# Altium PCB pcb(acdc, standart).PcbDoc
Units mm, origin at the board's own origin, x right, y up, seen from the top; angles counter-clockwise.
Board outline 137.16 x 88.9 mm, 2 copper layers (Top Layer, Bottom Layer); 37 components, 25 nets, 101 pads, 2 vias.
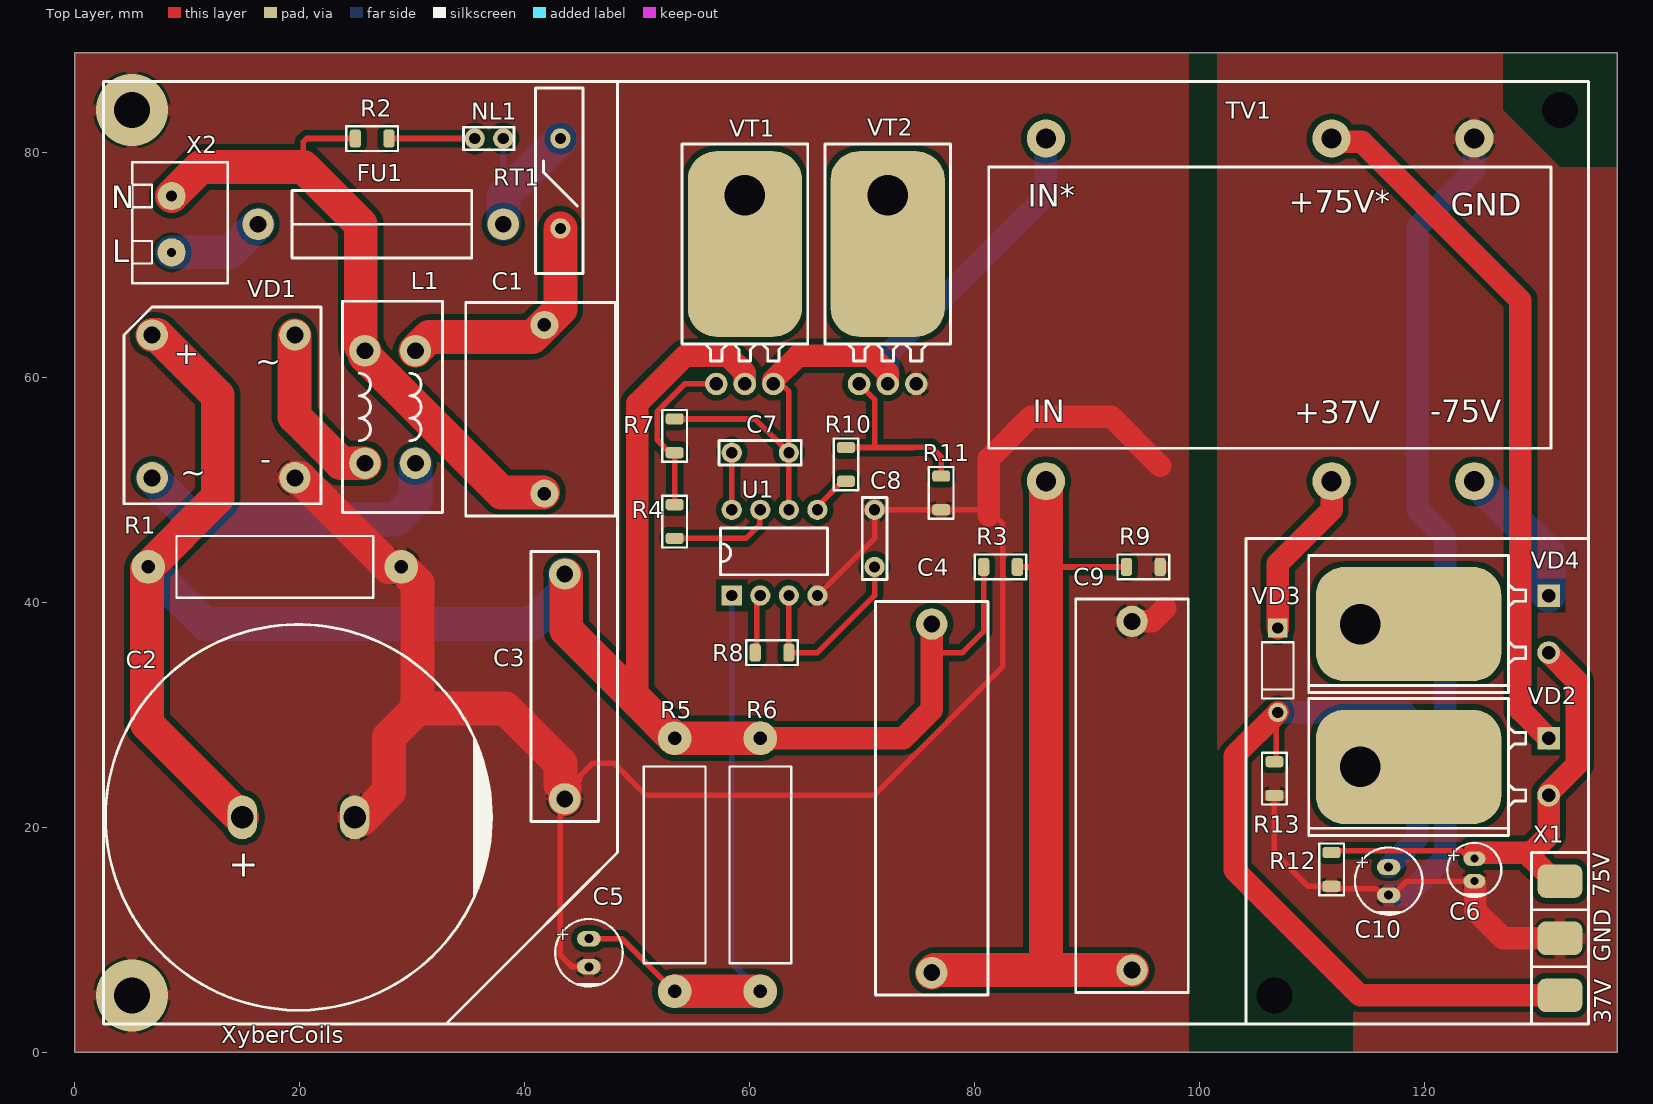
[diagram p0: Top Layer view]
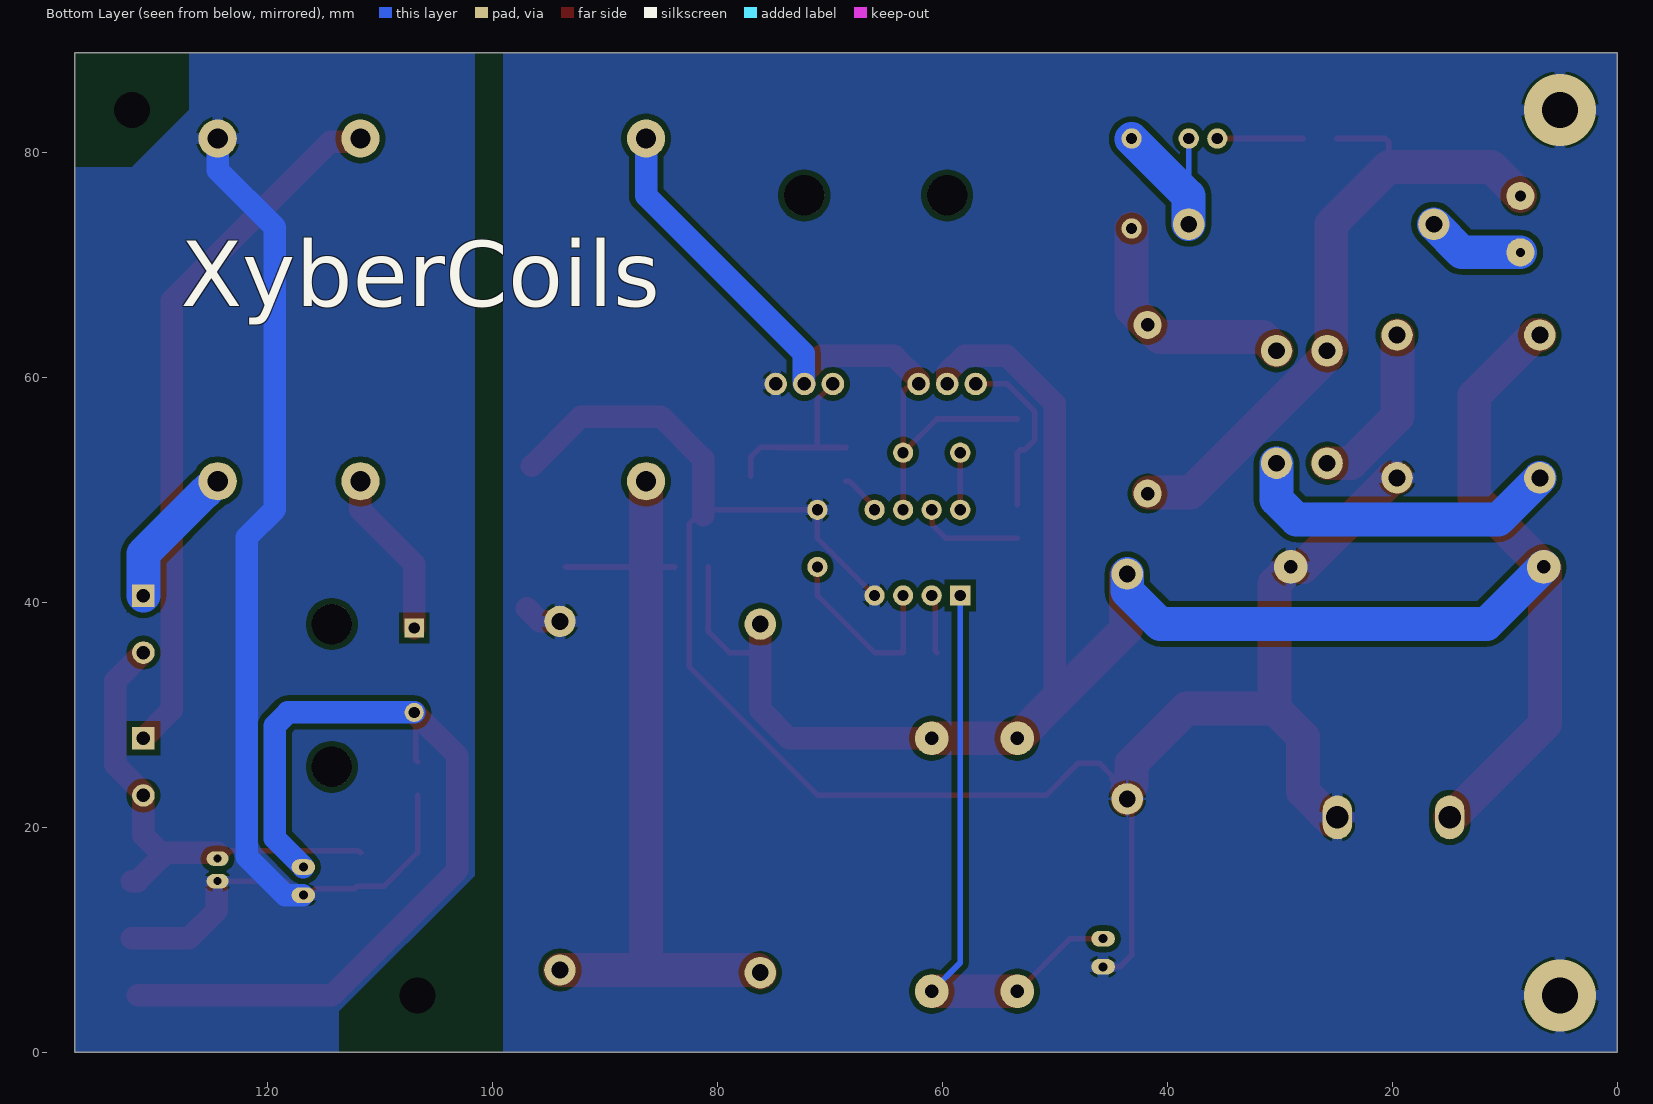
[diagram p1: Bottom Layer view, seen from below]

## Layer stack, top to bottom
Top Solder: solder mask 0.0102, Solder Resist, Dk 3.5
Top Layer: signal copper 0.0356
Dielectric 1: dielectric 0.32, FR-4, Dk 4.8
Bottom Layer: signal copper 0.0356
Bottom Solder: solder mask 0.0102, Solder Resist, Dk 3.5

## Board outline
0,0 0,88.9 137.16,88.9 137.16,0

## Design rules (kind name [scope] priority, off if disabled: settings)
Clearance [All] p1: gap=0.5 ignorepadtopadclearanceinfootprint=FALSE except(0: Arc-Text Track-Text SMDPad-Hole THPad-Hole Via-Hole Fill-Hole Poly-Hole Region-Hole Text-Hole; 0.254: Arc-Via Arc-Hole Track-Via Track-Hole SMDPad-SMDPad SMDPad-THPad SMDPad-Via SMDPad-Text THPad-THPad THPad-Via THPad-Text Via-Via Via-Text Fill-Text Poly-Text Region-Text Text-Text)
Height [All] p1: minheight=0 maxheight=50 prefheight=12.7
HoleSize [All] p1: absolutevalues=TRUE maxlimit=5 minlimit=0.025 maxpercent=80.000 minpercent=20.000
PlaneConnect [All] p1: planeconnectstyle=Relief reliefexpansion=0.508 reliefentries=4 reliefconductorwidth=1 reliefairgap=0.254
PolygonConnect [All] p1: connectstyle=Relief reliefconductorwidth=1 reliefentries=4 polygonreliefangle="90 Angle" airgapwidth=0.254
RoutingVias [All] p1: holewidth=0.6 width=1 viastyle="Through Hole" minholewidth=0.6 minwidth=1 maxholewidth=0.711 maxwidth=1
SolderMaskExpansion [All] p1: expansion=0.102 istentingtop=FALSE
Width [All] p1: maxlimit=3 minlimit=0.5 preferedwidth=2 minimp=50.000000 maximp=50.000000 favimp=50.000000
27 further rules are at their usual default settings.

## Components (designator, comment, footprint, x,y, rotation, side; value= is the part's Value field where it differs from the comment)
C1 "220n" "Конд_эмп P 15ММ" 41.761,49.704 r90 top
C2 "470u" "кондер ELEC D35.00mm S10.00mm H40.00mm" 19.889,20.913 r180 top
C3 "1u" "Конд_плен - P 20мм" 43.57,22.553 r90 top
C4 "4.7u" "конд металопленочный P 31мм" 76.2,38.1 r270 top
C5 "100u" "конд ELEC D6.30mm S2.50mm H11.00mm" 45.72,8.87 r90 top
C6 "47u" "конд ELEC D5.00mm S2.00mm H11.00mm" 124.46,16.24 r90 top
C7 "1u" "конд. кер. мн. слойные" 63.5,53.34 r180 top
C8 "1n" "конд. кер. мн. слойные" 71.12,48.26 r270 top
C9 "4.7u" "конд металопленочный P 31мм" 94.017,7.335 r90 top
C10 "47u" "конд ELEC D6.30mm S2.50mm H11.00mm" 116.84,15.24 r90 top
FU1 "8A" "предохранитель 20х5" 16.3,73.66 r0 top
L1 "FL2D-A2-202" "синфазный дросель FL2D-A2-202" 25.793,62.408 r270 top
NL1 "Lamp (Neon)" "2 PIN" 35.56,81.28 r0 top
R1 "51k 2W" "Res 2w" 17.78,43.18 r180 top
R2 "180k" R1206 24.94,81.28 r0 top
R3 "120k" R1206 80.82,43.18 r0 top
R4 "25" R1206 53.34,45.72 r90 top
R5 "51k 2W" "Res 2w" 53.34,16.69 r90 top
R6 "51k 2W" "Res 2w" 60.96,16.69 r90 top
R7 "10k" R1206 53.34,56.34 r270 top
R8 "36k" R1206 63.5,35.56 r180 top
R9 "120k" R1206 93.52,43.18 r0 top
R10 "25" R1206 68.58,50.8 r90 top
R11 "10k" R1206 77.049,48.26 r90 top
R12 "33k" R1206 111.76,14.78 r90 top
R13 "10k" R1206 106.68,22.86 r90 top
RT1 "JNR15S070L" "NTC 15мм (посадочное8мм)" 43.18,81.28 r270 top
TV1 "4:1:1:2" "Imp trans (2 wind, 2 sold)" 86.36,81.28 r0 top
U1 "IR2153D" "DIP 8" 58.42,40.64 r90 top
VD1 "BR1010" "BR_10(диодный мост)" 6.876,63.806 r0 top
VD2 "BYC10-600PQ" "TO-220-top(2 PIN DIODE)" 131.064,22.86 r270 top
VD3 "HER101" DO-41 106.98,37.741 r270 top
VD4 "BYC10-600PQ" "TO-220-top(2 PIN DIODE)" 131.064,35.56 r270 top
VT1 "FCPF7N60" TO-220-top 57.047,59.457 r180 top
VT2 "FCPF7N60" TO-220-top 69.747,59.457 r180 top
X1 "Soldering" "place 3" 132.08,10.16 r0 top
X2 "Soldering" 5мм 8.606,73.66 r270 top

## Footprints (in the part's own frame and the unit in brackets; to place one, negate y for a bottom-side part, rotate by r counter-clockwise, add the part's x,y. Pads: shape width x height; smd on the part's side, far side on the other; paste and mask are expansions set on the pad)
"2 PIN" [mm]
  round 1.8 hole 1: 1(0,0) 2(2.54,0)
  silkscreen extent -1,-1 3.5,1
5мм [mm]
  round 2.5 hole 0.8: 1(2.5,0)
  round 2.5 hole 1: 2(-2.5,0)
  silkscreen extent -5.5,-3.5 5.25,5, body extent -5.25,-3.3 5,4.5, height 10.7
"BR_10(диодный мост)" [mm]
  round 2.8 hole 1.5: 1(0,-12.7) 2(12.7,0) 3(12.7,-12.7) 4(0,0)
  silkscreen extent -2.5,-15 15,2.5
"DIP 8" [mm]
  rect 1.8x1.8 hole 1: 1(0,0)
  round 1.8 hole 1: 2(0,-2.54) 3(0,-5.08) 4(0,-7.62) 5(7.62,-7.62) 6(7.62,-5.08) 7(7.62,-2.54) 8(7.62,0)
  silkscreen extent 1.85,-8.5 6,1
DO-41 [mm]
  rect 1.7x1.7 hole 1: 1(0,0)
  round 1.7 hole 1: 2(7.5,0)
  silkscreen extent 1.25,-1.4 6.25,1.4, body extent -0.41,-1.2 7.91,1.2, height 2.53
"Imp trans (2 wind, 2 sold)" [mm]
  round 3.4 hole 1.8: 1(0,0) 2(0,-30.48) 3(25.4,0) 4(25.4,-30.48) 5(38.1,0) 6(38.1,-30.48)
  silkscreen extent -5.08,-27.54 44.92,-2.54
"NTC 15мм (посадочное8мм)" [mm]
  round 1.8 hole 1: 1(0,0) 2(8,0)
  silkscreen extent -4.5,-2.2 12,2
"place 3" [mm]
  rrect50% 4x3 smd: 1(0,5.08) 2(0,0) 3(0,-5.08)
  silkscreen extent -2.54,-7.62 2.54,7.62
R1206 [mm]
  rrect50% 1x1.6 smd: 1(0,0) 2(3,0)
  silkscreen extent -0.8,-1.1 3.8,1.1, body extent -0.03,-0.77 2.98,0.78, height 0.55
"Res 2w" [mm]
  round 3 hole 1.2: 1(-11.25,0) 2(11.25,0)
  silkscreen extent -8.75,-2.75 8.75,2.75, body extent -11.65,-2.5 11.65,2.5, height 5.5
TO-220-top [mm]
  rrect50% 10.16x16.51 smd: 0(-2.54,-12.446)
  round 3.556 hole 3.6: 0(-2.54,-16.764)
  round 2 hole 1.2: 1(0,0) 2(-2.54,0) 3(-5.08,0)
  silkscreen extent -8.13,-21.34 3.05,-2.03
"TO-220-top(2 PIN DIODE)" [mm]
  rrect50% 10.16x16.51 smd: 0(-2.54,-12.446)
  round 3.556 hole 3.6: 0(-2.54,-16.764)
  rect 2x2 hole 1.2: 1(-5.08,0)
  round 2 hole 1.2: 2(0,0)
  silkscreen extent -8.64,-21.34 3.56,-2.03
"конд ELEC D5.00mm S2.00mm H11.00mm" [mm] "5mm Diameter 2mm Lead Spacing Aluminum Electrolytic Capacitors Radial, Can"
  oval 1.3x1.95 hole 0.7: 1(1,0) 2(-1,0)
  silkscreen extent -2.4,-2.4 2.4,2.4, body extent -2.51,-2.5 2.5,2.5, height 11
"конд ELEC D6.30mm S2.50mm H11.00mm" [mm] "6.30mm Diameter 11.00mm Lead Spacing Aluminum - Polymer Capacitors Radial, Can"
  oval 1.4x2.1 hole 0.8: 1(1.25,0) 2(-1.25,0)
  silkscreen extent -3,-3 3,3, body extent -3.16,-3.15 3.15,3.15, height 11
"конд металопленочный P 31мм" [mm]
  round 2.8 hole 1.5: 1(0,0) 2(31,0)
  silkscreen extent -2,-5 33,5
"конд. кер. мн. слойные" [mm]
  round 1.8 hole 1: 1(0,0) 2(5.08,0)
  silkscreen extent -1.1,-1.1 6.2,1.1
"Конд_плен - P 20мм" [mm]
  round 2.8 hole 1.5: 1(0,0) 2(20,0)
  silkscreen extent -2,-3 22,3
"Конд_эмп P 15ММ" [mm]
  round 2.5 hole 1.2: 1(0,0) 2(15,0)
  silkscreen extent -2,-6.29 17,7
"кондер ELEC D35.00mm S10.00mm H40.00mm" [mm] "35mm Diameter 10mm Lead Spacing Aluminum Electrolytic Capacitors Radial, Can , Snap-In"
  oval 2.6x3.9 hole 2: 1(5,0) 2(-5,0)
  silkscreen extent -17.18,-17.15 17.15,17.15
"предохранитель 20х5" [mm]
  round 2.8 hole 1.5: 1(0,0) 2(21.8,0)
  silkscreen extent 3,-3 19,3
"синфазный дросель FL2D-A2-202" [mm]
  round 2.8 hole 1.5: 1(0,4.5) 2(0,0) 3(10,0) 4(10,4.5)
  silkscreen extent -4.4,-2 14.4,6.9

## Part data
C1 C3 C7 C8: library part Capacitor
C2: library part "Capacitor (Electrolytic)"
C4 C9: library part Capacitor, "К73-17"
C5: library part "Capacitor (Electrolytic)", "K50-35 25V"
C6: library part "Capacitor (Electrolytic)", "К50-35 100V"
C10: library part "Capacitor (Electrolytic)", "К50-35 50V"
FU1: library part Fuse
L1: library part "Common Choke", "2x2mH, 12A, 2x145mOhm"
R1: library part Resistor, "2W"
R2 R3 R4 R5 R6 R7 R8 R9 R10 R11 R12 R13: library part Resistor
RT1: library part Thermistor
TV1: library part "Transformer (2 Windings, 2 Soldering)"
U1: library part IC_Driver_IR2153
VD1: library part "Diode Bridge (1 Phase)"
VD2 VD3 VD4: library part Diode
VT1 VT2: library part "Transistor (MOSFET, N, EMode)"
X1: library part "Terminal block (3-pin)"
X2: library part "Terminal block (2-pin)"

## Free pads (board coordinates)
  round 0 hole 3.2 unplated: 0(106.68,5.08) 0(132.08,83.82)

## Via types
v1: diameter 6.4, hole 3.2, Top Layer to Bottom Layer, 2 vias

## Nets (pads, with @x,y where several pads share a name; then routed paths per layer and width w, separated by ;. In a path a pad name is that pad's centre, name@x,y a point inside that pad or via, vN(x,y) a via of type N, cw(c..) or ccw(c..) an arc to the next point about the centre after c; other vN are vias at no path point)
GND: C6.2 C10.2 R12.1 R13.1 TV1.5 X1.2 | length 109.1
  Top Layer w0.5: R13.1 106.68,17.78 109.68,14.78 R12.1 112.06,14.78 112.283,14.557 115.747,14.557 116.314,13.99 C10.2 117.19,13.99 118.44,15.24 C6.2
  Top Layer w2: C6.2@124.524,14.837 124.524,12.636 127,10.16 X1.2
  Bottom Layer w2: C10.2@116.89,13.99 118.453,13.99 121.88,17.417 121.88,45.81 119.38,48.31 119.38,73.391 124.46,78.471 TV1.5
MASS: C2.2 C3.1 C5.2 C8.1 C9.2 R1.1 R9.2 R11.1 U1.4 VD1.3 VT2.3 | length 181.2
  Top Layer w0.5: C5.2 44.213,7.62 43.18,8.653 43.18,22.163 43.396,22.379 C3.1 43.57,22.897 44.919,24.245 44.919,24.599 46.04,25.72 47.94,25.72 50.8,22.86 71.055,22.86 82.53,34.335 82.53,47.01 81.747,47.793 ; U1.4 71.12,45.72 C8.1 74.11,48.26 R11.1 80.753,48.26 80.815,48.26 81.28,47.795
  Top Layer w2: 81.28,47.793 81.28,47.795 81.28,52.785 85.035,56.54 92.148,56.54 96.52,52.168 ; C9.2 95.795,38.335 96.967,39.507
  Top Layer w3: VD1.3 20.014,51.106 27.94,43.18 R1.1 30.48,41.73 30.48,30.6 ; C2.2 25.152,20.65 25.4,20.65 27.94,23.19 27.94,28.06 30.48,30.6 ; C3.1 43.57,23.431 43.18,23.821 43.18,25.72 38.3,30.6 30.48,30.6
  other v1: 5.08,5.08 5.08,83.82
NetC1_1: C1.1 L1.2 R2.1 X2.2 | length 59.7
  Top Layer w0.5: 20.32,78.74 20.32,80.987 20.613,81.28 R2.1
  Top Layer w3: X2.2 11.186,78.74 20.32,78.74 25.435,73.625 25.435,62.766 L1.2 25.793,61.958 37.947,49.804 C1.1@41.661,49.804
NetC1_2: C1.2 L1.1 RT1.2 | length 21.6
  Top Layer w3: L1.1 31.513,63.628 40.685,63.628 43.18,66.122 RT1.2
NetC2_1: C2.1 C3.2 C4.1 R1.2 R3.1 R5.2 R6.2 VD1.4 VT1.2 | length 194.2
  Top Layer w0.5: 76.2,35.56 78.935,35.56 80.82,37.445 R3.1
  Top Layer w2: 50.035,31.245 50.035,57.724 54.268,61.957 58.082,61.957 59.587,60.452 VT1.2 ; R6.2 73.66,27.94 76.2,30.48 76.2,35.56 C4.1
  Top Layer w3: VD1.4 7.314,63.806 12.7,58.42 12.7,49.35 6.412,43.062 6.412,29.228 14.727,20.913 C2.1 ; C3.2@43.702,42.422 43.702,37.578 50.035,31.245 R5.2 R6.2
  Bottom Layer w3: R1.2 11.61,38.1 40.64,38.1 43.57,41.03 C3.2
NetC4_2: C4.2 C9.1 R3.2 R9.1 TV1.2 | length 72.2
  Top Layer w0.5: R3.2 86.36,43.18 R9.1 ; 85.428,40.985 86.015,40.985 86.36,40.64
  Top Layer w3: C4.2 76.435,7.335 86.36,7.335 ; TV1.2 86.36,43.18 86.36,40.64 86.36,7.335 ; C9.1 86.36,7.335
NetC5_1: C5.1 R5.1 R6.1 U1.1 | length 53.4
  Top Layer w0.5: C5.1 48.66,10.12 R5.1
  Top Layer w3: R5.1 R6.1
  Bottom Layer w0.5: U1.1 58.42,7.98 R6.1
NetC6_1: C6.1 R12.2 VD2.2 VD4.2 X1.1 | length 42
  Top Layer w0.5: R12.2 111.929,17.949 123.273,17.949 C6.1@123.951,17.271
  Top Layer w2: C6.1@124.46,17.78 129.54,17.78 ; VD4.2 133.564,33.06 133.564,25.569 131.064,23.069 131.064,19.304 129.54,17.78 ; X1.1 131.58,15.24 129.54,17.28 129.54,17.78
NetC7_1: C7.1 R7.1 TV1.1 U1.6 VT1.3 VT2.2 | length 64.2
  Top Layer w0.5: R7.1 60.5,56.34 C7.1 ; VT1.3 62.414,59.17 63.1,59.17 63.5,58.769 C7.1 ; U1.6 C7.1
  Top Layer w2: VT1.3 62.127,59.788 64.295,61.957 70.782,61.957 72.287,60.452 VT2.2
  Bottom Layer w2: VT2.2 72.327,59.497 72.327,62.167 86.36,76.2 TV1.1
NetC7_2: C7.2 U1.8 | length 5.1
  Top Layer w0.5: U1.8 C7.2
NetC8_2: C8.2 R8.1 U1.3 | length 17.4
  Top Layer w0.5: R8.1@63.5,35.762 U1.3 ; R8.1@63.5,35.86 R8.1 66.04,35.56 71.12,40.64 C8.2
NetC10_1: C10.1 R13.2 VD3.2 X1.3 | length 79.5
  Top Layer w0.5: R13.2 106.83,26.01 VD3.2@106.83,30.091
  Top Layer w2: VD3.2 103.148,26.409 103.148,16.232 114.3,5.08 X1.3@131.58,5.08
  Bottom Layer w2: VD3.2 118.208,30.241 119.38,29.069 119.38,19.03 C10.1
NetFU1_1: FU1.1 X2.1 | length 8.7
  Bottom Layer w3: X2.1 13.8,71.16 FU1.1
NetFU1_2: FU1.2 NL1.2 RT1.1 | length 14.3
  Bottom Layer w0.5: 38.1,76.688 NL1.2
  Bottom Layer w3: FU1.2 38.127,73.687 38.127,76.173 38.1,76.2 ; 38.117,76.183 RT1.1@43.18,81.246
NetL1_3: L1.3 VD1.2 | length 15.2
  Top Layer w3: VD1.2@19.526,63.756 19.526,56.544 23.662,52.408 L1.3
NetL1_4: L1.4 VD1.1 | length 28.9
  Bottom Layer w3: VD1.1@6.876,51.096 10.572,47.4 28.536,47.4 30.293,49.157 L1.4
NetNL1_1: NL1.1 R2.2 | length 7.6
  Top Layer w0.5: R2.2 NL1.1
NetR4_1: R4.1 U1.7 | length 9.4
  Top Layer w0.5: R4.1 59.67,45.72 60.919,46.968 60.919,48.219 U1.7
NetR4_2: R4.2 R7.2 VT1.1 | length 15.4
  Top Layer w0.5: R4.2 R7.2 53.09,53.59 52.683,53.59 51.79,54.483 51.79,57.004 54.242,59.457 VT1.1
NetR8_2: R8.2 U1.2 | length 5.3
  Top Layer w0.5: R8.2 60.641,35.701 60.641,39.969 60.96,40.288 U1.2
NetR10_1: R10.1 U1.5 | length 3.8
  Top Layer w0.5: U1.5 66.04,48.56 68.28,50.8 R10.1
NetR10_2: R10.2 R11.2 VT2.1 | length 16.8
  Top Layer w0.5: R10.2 71.12,53.8 ; VT2.1 71.12,58.083 71.12,53.8 ; R11.2 77.049,52.951 76.166,53.834 74.639,53.834 74.605,53.8 71.12,53.8
NetTV1_3: TV1.3 VD2.1 | length 62.7
  Top Layer w2: TV1.3 112.028,81.012 114.433,81.012 128.563,66.882 128.563,30.441 VD2.1
NetTV1_4: TV1.4 VD3.1 | length 15
  Top Layer w2: VD3.1 106.98,43.48 111.76,48.26 TV1.4
NetTV1_6: TV1.6 VD4.1 | length 13
  Bottom Layer w3: TV1.6 124.568,50.8 125.493,49.875 125.549,49.875 131.063,44.361 VD4.1
pads on no net: VD2.0 VD4.0 VT1.0 VT2.0

## Polygon pours and split planes (outlines as drawn)
GND on Top Layer "NONET_L-01_P-001" (solid, pour order 3): 101.6,88.9 137.16,88.9 137.16,0 101.6,0
MASS on Top Layer "NONET_L-01_P-001" (solid, pour order 0): 0,88.9 99.06,88.9 99.06,0 0,0
GND on Bottom Layer "NONET_L-01_P-001" (solid, pour order 2): 101.6,88.9 137.16,88.9 137.16,0 101.6,0
MASS on Bottom Layer "NONET_L-01_P-001" (solid, pour order 1): 0,88.9 99.06,88.9 99.06,0 0,0

## Other copper
Multi-Layer:
  pour cut-out: 101.6,15.731 113.683,3.648 113.683,0 101.6,0
  pour cut-out: 127,88.9 127,83.82 132.08,78.74 137.16,78.74 137.16,88.9

## Silkscreen, mask and mechanical layers (free items; w line width, h text height)
Top Overlay:
  lines w0.254: 33.02,2.54 2.54,2.54 2.54,86.36 48.26,86.36 ; 33.02,2.54 38.735,8.255 45.085,14.605 48.26,17.78 48.26,86.36 ; 33.02,2.54 101.6,2.54 104.14,2.54 ; 48.26,86.36 134.62,86.36 134.62,45.72 ; 104.14,2.54 134.62,2.54 134.62,45.72 ; 104.14,2.54 104.14,45.72 134.62,45.72
  text "IN*" at 84.733,75.211 h2
  text "N" at 3.255,75.08 h2
  text "+75V*" at 107.952,74.688 h2
  text "GND" at 122.355,74.434 h2
  text "L" at 3.305,70.275 h2
  text "-75V" at 120.524,56.066 h2
  text "IN" at 85.185,56.036 h2
  text "+37V" at 108.425,55.971 h2
  text "75V" at 136.517,13.79 h1.5 r90
  text "GND" at 136.597,8.057 h1.5 r90
  text "37V" at 136.623,2.564 h1.5 r90
  text "XyberCoils" at 13,0.8 h1.5
Bottom Overlay:
  text "XyberCoils" at 127.749,64.468 h10
Mechanical 1:
  the board outline again, w0.254

## Text inside footprints (layer, text, board x,y; h text height)
C2: Top Overlay "+" at 16.335,18.471 h4 r180
C5: Top Overlay "+" at 44.32,9.82 h2 r90
C6: Top Overlay "+" at 123.56,16.84 h2 r90
C10: Top Overlay "+" at 115.44,16.19 h2 r90
VD1: Top Overlay "+" at 8.792,61.222 h2; Top Overlay "~" at 9.376,50.64 h2; Top Overlay "~" at 16.061,60.477 h2; Top Overlay "-" at 16.471,51.799 h2